# Altium PCB ADC_Board.PcbDoc
Units mm, origin at the board's own origin, x right, y up, seen from the top; angles counter-clockwise.
Board outline 60 x 60 mm, 2 copper layers (Top Layer, Bottom Layer); 77 components, 55 nets, 212 pads, 89 vias.
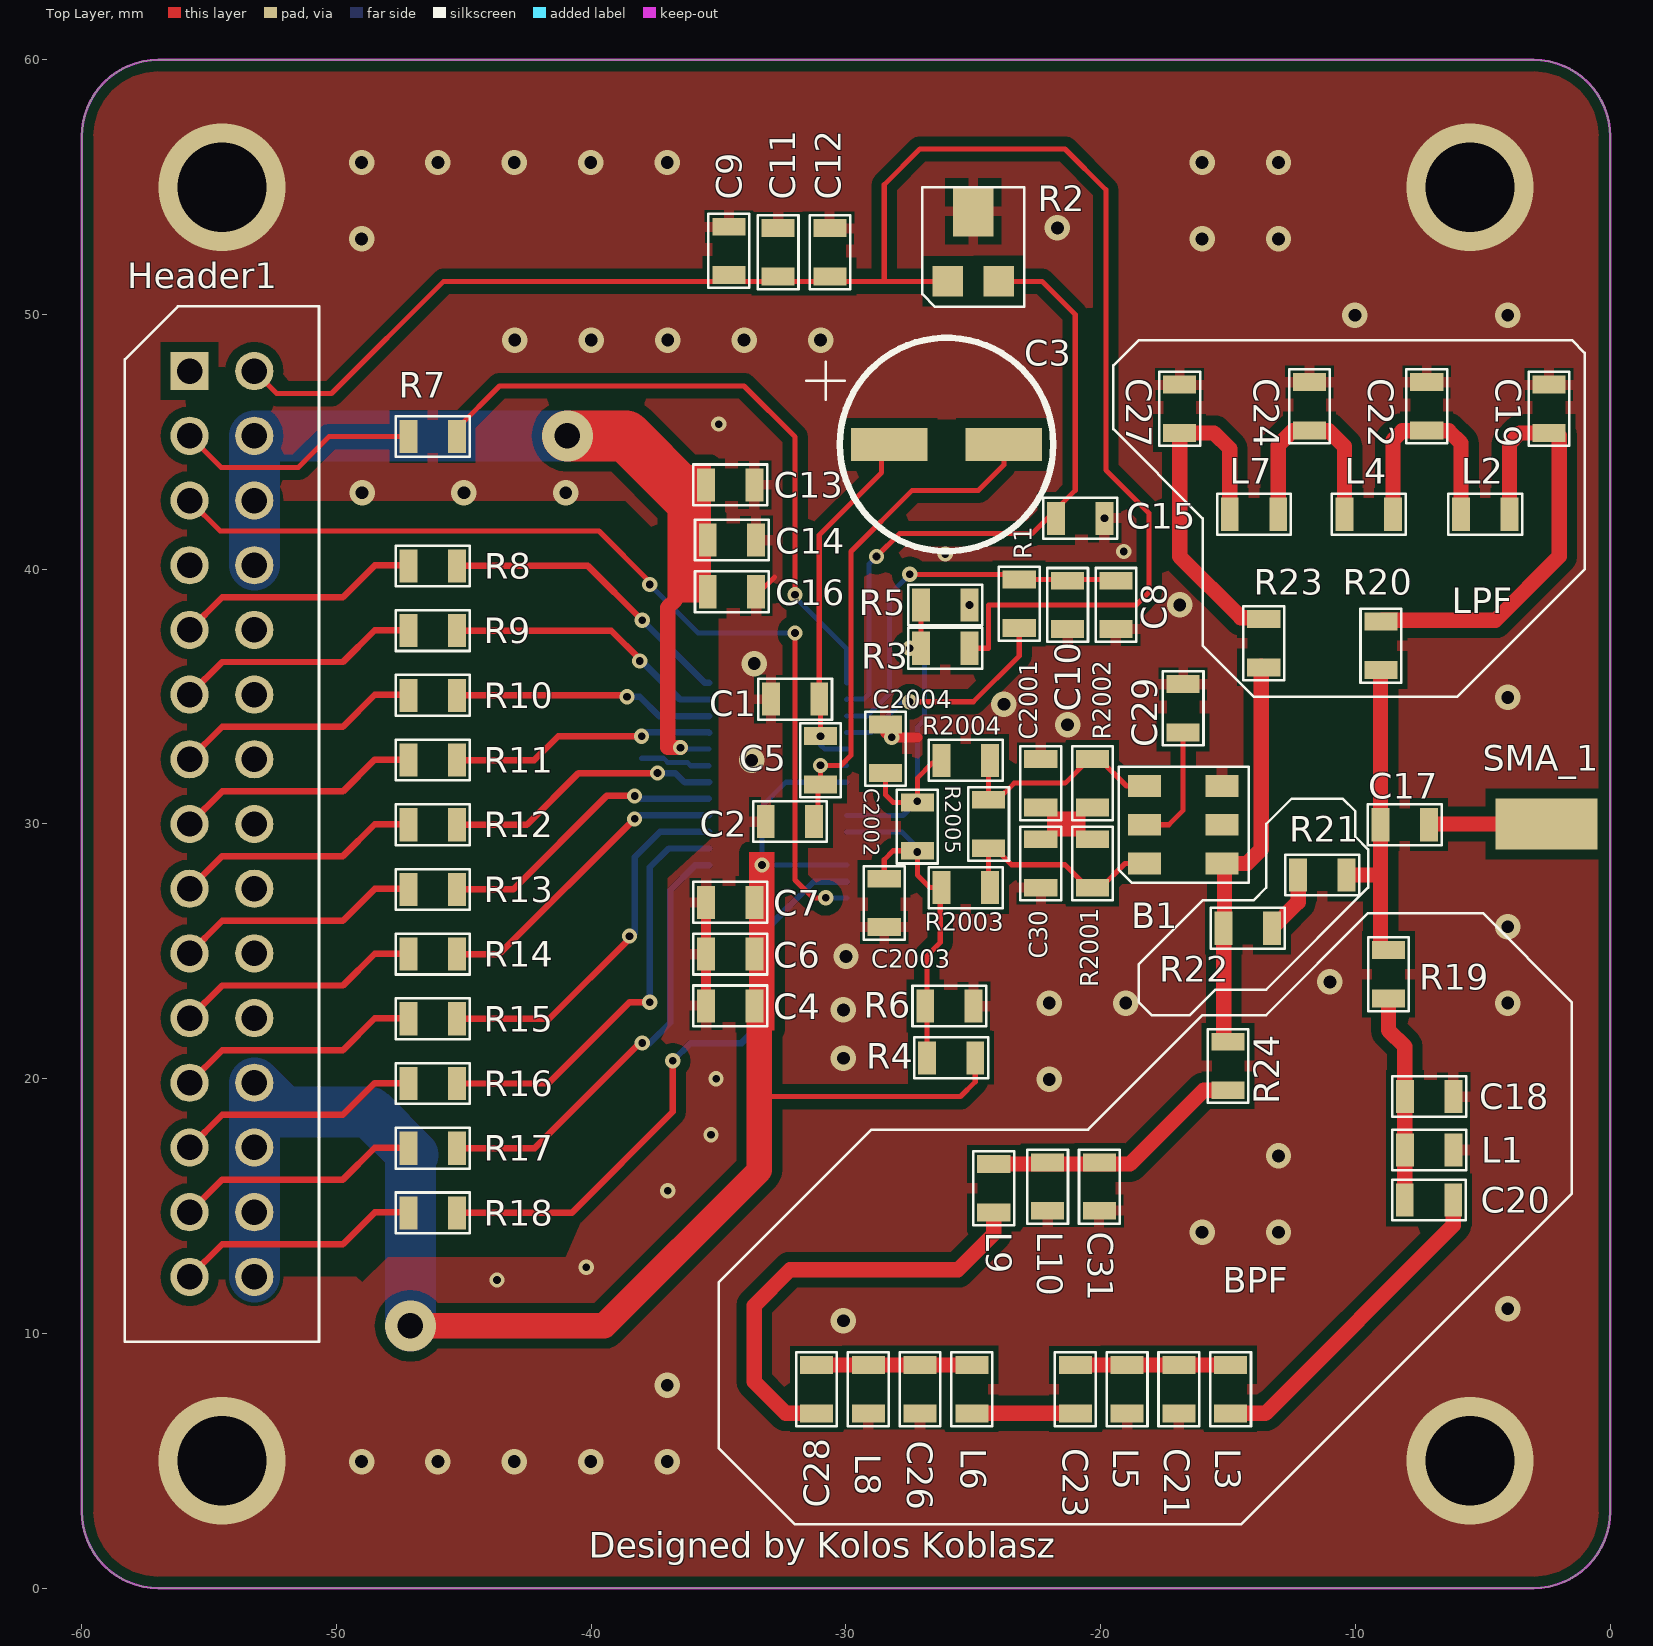
[diagram p0: Top Layer view]
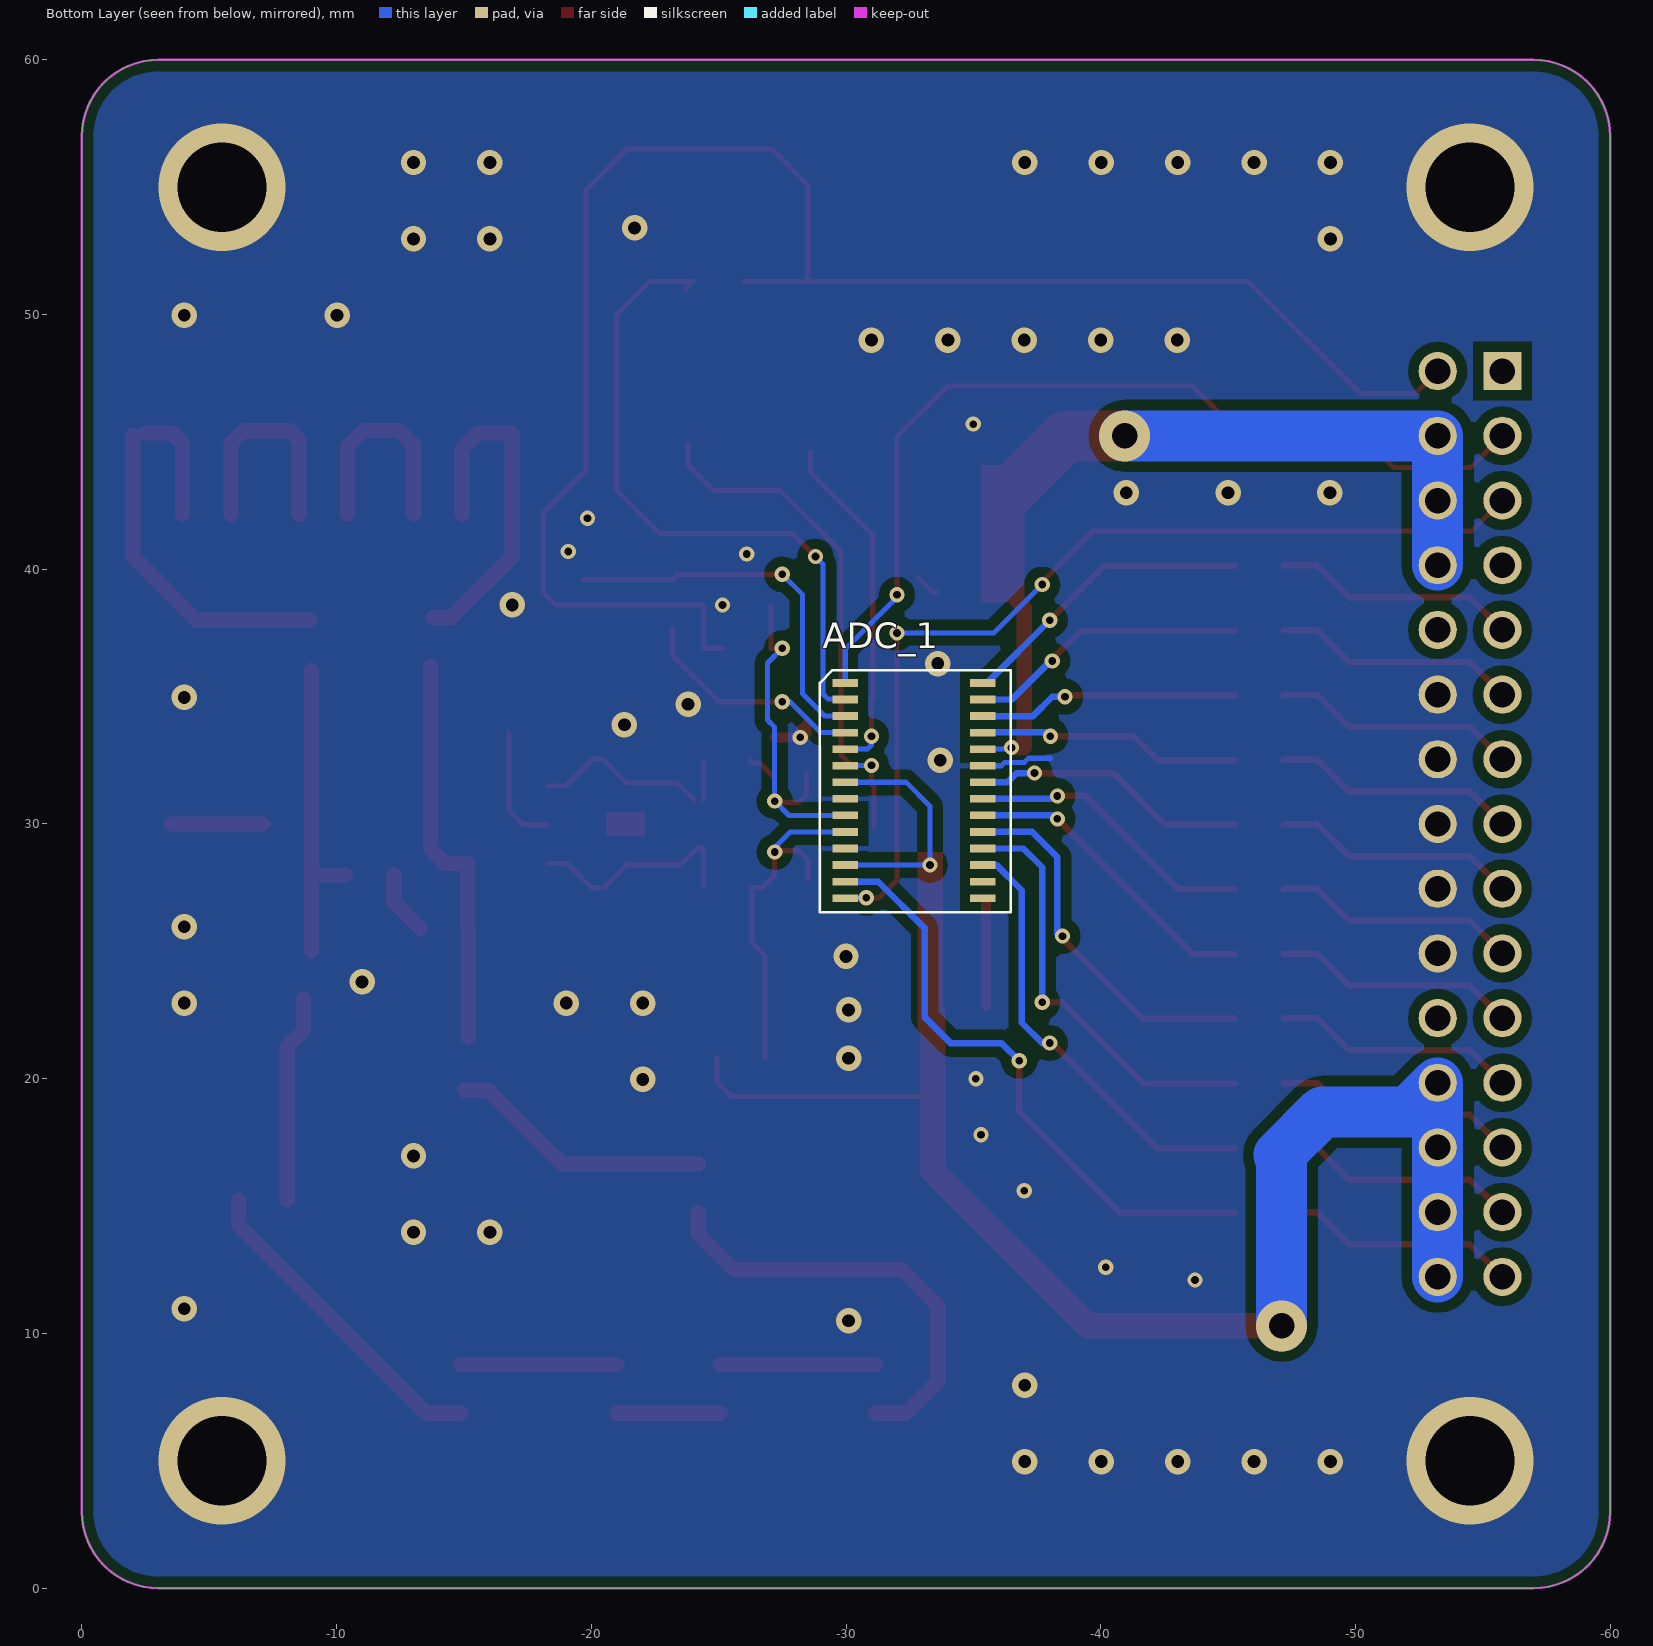
[diagram p1: Bottom Layer view, seen from below]

## Layer stack, top to bottom
Top Solder: solder mask 0.0102, Solder Resist, Dk 3.5
Top Layer: signal copper 0.0356
Dielectric 1: dielectric 0.32, FR-4, Dk 4.8
Bottom Layer: signal copper 0.0356
Bottom Solder: solder mask 0.0102, Solder Resist, Dk 3.5

## Board outline
-57,0 cw(c-57,3) -60,3 -60,57 cw(c-57,57) -57,60 -3,60 cw(c-3,57) 0,57 0,3 cw(c-3,3) -3,0

## Design rules (kind name [scope] priority, off if disabled: settings)
Clearance "Stitching GND" [IsStitchingVia and InNet('GND') vs (IsVia and (Not IsStitchingVia)) Or IsPad  Or IsTrack] p1: gap=2
Clearance Clearance_1 [All vs OnLayer('Keep-Out Layer')] p2: gap=0.4 except(0.2: SMDPad-Poly THPad-Poly Via-Poly)
Clearance [All] p3: gap=0.18 except(0.4: Track-Poly SMDPad-Poly THPad-Poly Via-Poly Fill-Poly)
HoleSize [All] p1: absolutevalues=TRUE maxlimit=6.7 minlimit=0.3 maxpercent=80.000 minpercent=20.000
Length [All] p1: maxlimit=2540 minlimit=0
MatchedLengths MatchedLengths_ADC [InNetClass('ADC_DataBus')] p1: tolerance=1 checknetsindiffpair=TRUE checkdiffpairvsdiffpair=FALSE checkxsignals=FALSE checkothers=FALSE
MatchedLengths MatchedLengths_DAC [InNetClass('DAC_DataBus')] p2: tolerance=1 checknetsindiffpair=TRUE checkdiffpairvsdiffpair=FALSE checkxsignals=FALSE checkothers=FALSE
MinimumAnnularRing [All] p1: minimumring=0.076
MinimumSolderMaskSliver [All] p1: minsoldermaskwidth=0
ParallelSegment [All] p1: limit=254 gap=0.254
PolygonConnect PolygonConnect_1 [HasFootprint('0805 SMD Passive')] p1: connectstyle=Relief reliefconductorwidth=0.4 reliefentries=4 polygonreliefangle="90 Angle" airgapwidth=0.3
PolygonConnect PolygonConnect_3 [HasFootprint('Balun_Coil_Craft_WBC')] p2: connectstyle=Relief reliefconductorwidth=0.4 reliefentries=4 polygonreliefangle="90 Angle" airgapwidth=0.3
PolygonConnect [HasFootprint('TC33-2')] p3: connectstyle=Relief reliefconductorwidth=0.4 reliefentries=4 polygonreliefangle="90 Angle" airgapwidth=0.3
PolygonConnect PolygonConnect_2 [All] p4: connectstyle=Direct reliefconductorwidth=0.4 reliefentries=4 polygonreliefangle="90 Angle" airgapwidth=0.3
RoutingTopology [All] p1: topology=Starburst
RoutingVias [All] p1: holewidth=0.5 width=1 viastyle="Through Hole" minholewidth=0.3 minwidth=0.45 maxholewidth=1 maxwidth=6
SilkToSilkClearance [All] p1: silktosilkclearance=0
SilkToSolderMaskClearance [IsPad] p1: minsilkscreentomaskgap=0 clearancetoexposedcopper=TRUE
SolderMaskExpansion [All] p1: expansion=0.102
Width [All] p1: maxlimit=5 minlimit=0.127 preferedwidth=0.254
25 further rules are at their usual default settings.

## Classes and differential pairs
net class ADC_DataBus: ADC_CLK ADC_D0 ADC_D1 ADC_D2 ADC_D3 ADC_D4 ADC_D5 ADC_D6 ADC_D7 ADC_D8 ADC_D9
component class ADC_Filter: C17 C18 C19 C20 C21 C22 C23 C24 C26 C27 C28 C31 L1 L2 L3 L4 L5 L6 L7 L8 L9 L10 R19 R20 R21 R22 R23 R24 SMA_1
component class ADC_board: ADC_1 B1 C1 C2 C3 C4 C5 C6 C7 C8 C9 C10 C11 C12 C13 C14 C15 C16 C29 C30 C2001 C2002 C2003 C2004 Header1 R1 R2 R3 R4 R5 R6 R7 R8 R9 R10 R11 R12 R13 R14 R15 R16 R17 R18 R2001 R2002 R2003 R2004 R2005

## Components (designator, comment, footprint, x,y, rotation, side; value= is the part's Value field where it differs from the comment)
ADC_1 "AD9215" AD9215 -29.972,35.538 r270 bottom locked
B1 "Balun" Balun_Coil_Craft_WBC -18.288,28.452 r90 top
C1 "Cap1" "0805 SMD Passive" -32,34.9 r0 top
C2 "Cap1" "0805 SMD Passive" -32.2,30.1 r180 top
C3 "Cap2" ELKO_CAP -28.3,44.9 r270 top
C4 "Cap1" "0805 SMD Passive" -34.544,22.86 r180 top
C5 "Cap1" "0805 SMD Passive" -31,32.5 r270 top
C6 "Cap1" "0805 SMD Passive" -34.544,24.892 r180 top
C7 "Cap1" "0805 SMD Passive" -34.544,26.924 r180 top
C8 "Cap1" "0805 SMD Passive" -19.4,38.6 r270 top
C9 "Cap1" "0805 SMD Passive" -34.6,52.5 r90 top
C10 "Cap1" "0805 SMD Passive" -21.3,38.6 r270 top
C11 "Cap1" "0805 SMD Passive" -32.664,52.444 r90 top
C12 "Cap1" "0805 SMD Passive" -30.632,52.444 r90 top
C13 "Cap1" "0805 SMD Passive" -34.544,43.314 r0 top
C14 "Cap1" "0805 SMD Passive" -34.478,41.148 r0 top
C15 "Cap1" "0805 SMD Passive" -20.8,42 r0 top
C16 "Cap1" "0805 SMD Passive" -34.478,39.116 r0 top
C17 "Cap1" "0805 SMD Passive" -8.062,29.972 r0 top
C18 "Cap1" "0805 SMD Passive" -7.1,19.3 r0 top
C19 "Cap1" "0805 SMD Passive" -2.4,46.3 r270 top
C20 "Cap1" "0805 SMD Passive" -7.112,15.24 r0 top
C21 "Cap1" "0805 SMD Passive" -16.932,7.812 r270 top
C22 "Cap1" "0805 SMD Passive" -7.2,46.4 r270 top
C23 "Cap1" "0805 SMD Passive" -20.996,7.812 r270 top
C24 "Cap1" "0805 SMD Passive" -11.8,46.4 r270 top
C26 "Cap1" "0805 SMD Passive" -27.092,7.812 r270 top
C27 "Cap1" "0805 SMD Passive" -16.9,46.3 r270 top
C28 "Cap1" "0805 SMD Passive" -31.156,7.812 r270 top
C29 "Cap1" "0805 SMD Passive" -16.764,34.544 r270 top
C30 "Cap1" "0805 SMD Passive" -22.352,28.448 r90 top
C31 "Cap1" "0805 SMD Passive" -20.052,15.764 r270 top
C2001 "Cap1" "0805 SMD Passive" -22.352,31.604 r270 top
C2002 "Cap1" "0805 SMD Passive" -27.2,29.9 r90 top
C2003 "Cap1" "0805 SMD Passive" -28.5,26.9 r270 top
C2004 "Cap1" "0805 SMD Passive" -28.448,32.954 r270 top
Header1 "Header1" Header1 -54.5,30 r270 top
L1 "Inductor" "0805 SMD Passive" -7.1,17.2 r180 top
L2 "Inductor" "0805 SMD Passive" -4.904,42.16 r0 top
L3 "Inductor" "0805 SMD Passive" -14.9,7.812 r90 top
L4 "Inductor" "0805 SMD Passive" -9.476,42.16 r0 top
L5 "Inductor" "0805 SMD Passive" -18.964,7.812 r90 top
L6 "Inductor" "0805 SMD Passive" -25.06,7.812 r90 top
L7 "Inductor" "0805 SMD Passive" -13.982,42.16 r0 top
L8 "Inductor" "0805 SMD Passive" -29.124,7.812 r90 top
L9 "Inductor" "0805 SMD Passive" -24.2,15.7 r90 top
L10 "Inductor" "0805 SMD Passive" -22.084,15.764 r90 top
R1 "Resistor" "0805 SMD Passive" -23.2,38.65 r90 top
R2 "VariableResistor" TC33-2 -26.004,51.306 r0 top
R3 "Resistor" "0805 SMD Passive" -26.1,36.9 r180 top
R4 "Resistor" "0805 SMD Passive" -25.874,20.82 r180 top
R5 "Resistor" "0805 SMD Passive" -26.1,38.6 r0 top
R6 "Resistor" "0805 SMD Passive" -25.94,22.852 r0 top
R7 "Resistor" "0805 SMD Passive" -46.228,45.212 r180 top
R8 "Resistor" "0805 SMD Passive" -46.228,40.132 r180 top
R9 "Resistor" "0805 SMD Passive" -46.228,37.592 r180 top
R10 "Resistor" "0805 SMD Passive" -46.228,35.052 r180 top
R11 "Resistor" "0805 SMD Passive" -46.228,32.512 r180 top
R12 "Resistor" "0805 SMD Passive" -46.228,29.972 r180 top
R13 "Resistor" "0805 SMD Passive" -46.228,27.432 r180 top
R14 "Resistor" "0805 SMD Passive" -46.228,24.892 r180 top
R15 "Resistor" "0805 SMD Passive" -46.228,22.352 r180 top
R16 "Resistor" "0805 SMD Passive" -46.228,19.812 r180 top
R17 "Resistor" "0805 SMD Passive" -46.228,17.272 r180 top
R18 "Resistor" "0805 SMD Passive" -46.228,14.732 r180 top
R19 "Resistor" "0805 SMD Passive" -8.7,24.1 r90 top
R20 "Resistor" "0805 SMD Passive" -9,37 r270 top
R21 "Resistor" "0805 SMD Passive" -11.3,28 r0 top
R22 "Resistor" "0805 SMD Passive" -14.224,25.908 r0 top
R23 "Resistor" "0805 SMD Passive" -13.6,37.1 r90 top
R24 "Resistor" "0805 SMD Passive" -15,20.5 r270 top
R2001 "Resistor" "0805 SMD Passive" -20.32,28.448 r270 top
R2002 "Resistor" "0805 SMD Passive" -20.32,31.604 r270 top
R2003 "Resistor" "0805 SMD Passive" -25.3,27.5 r180 top
R2004 "Resistor" "0805 SMD Passive" -25.3,32.5 r180 top
R2005 "Resistor" "0805 SMD Passive" -24.4,30 r270 top
SMA_1 "SMA1" "SMA Flange" -2.5,30 r90 top

## Footprints (in the part's own frame and the unit in brackets; to place one, negate y for a bottom-side part, rotate by r counter-clockwise, add the part's x,y. Pads: shape width x height; smd on the part's side, far side on the other; paste and mask are expansions set on the pad)
"0805 SMD Passive" [mm] "General 0805 SMD componenet footprint"
  rect 0.7x1.3 smd: 1(-0.95,0) 2(0.95,0)
  Top Layer pour cut-out: -0.6,0.65 0.6,0.65 0.6,-0.65 -0.6,-0.65
  silkscreen extent -1.45,-0.8 1.45,0.8, body extent -1.15,-0.6 1.15,0.6, height 0.45
AD9215 [mm] "TSSOP-28"
  rect 0.3x1 smd: 1(0,0) 2(0.65,0) 3(1.3,0) 4(1.95,0) 5(2.6,0) 6(3.25,0) 7(3.9,0) 8(4.55,0) 9(5.2,0) 10(5.85,0) 11(6.5,0) 12(7.15,0) 13(7.8,0) 14(8.45,0) 15(8.45,5.4) 16(7.8,5.4) 17(7.15,5.4) 18(6.5,5.4) 19(5.85,5.4) 20(5.2,5.4) 21(4.55,5.4) 22(3.9,5.4) 23(3.25,5.4) 24(2.6,5.4) 25(1.95,5.4) 26(1.3,5.4) 27(0.65,5.4) 28(0,5.4)
  silkscreen extent -0.5,-1 9,6.5, body extent 0,0 8.5,5.5, height 1.45
Balun_Coil_Craft_WBC [mm] "SMD Transformer"
  rect 0.85x1.3 smd: 1(0,0) 2(1.52,0) 3(3.04,0) 4(3.04,-3.05) 5(1.52,-3.05) 6(0,-3.05)
  Top Layer pour cut-out: -0.8,-0.8 3.8,-0.8 3.8,-2.2 -0.8,-2.2
  silkscreen extent -0.75,-4.1 3.8,1, body extent -0.25,-3.75 3.04,0.25, height 3
ELKO_CAP [mm] "Electrolit SMD capacitor"
  rect 1.3x3 smd: 1(0,0) 2(0,4.5)
  Top Layer pour cut-out: 1,3 -1,3 -1,1.5 1,1.5
  silkscreen extent -4.19,-3.25 4.19,6.44, body extent -2.48,0.01 2.5,5, height 5.4
Header1 [mm] "30-Pin DIL"
  rect 1.5x1.5 hole 1: 1(-17.78,-1.27)
  round 1.5 hole 1: 2(-17.78,1.27) 3(-15.24,-1.27) 4(-15.24,1.27) 5(-12.7,-1.27) 6(-12.7,1.27) 7(-10.16,-1.27) 8(-10.16,1.27) 9(-7.62,-1.27) 10(-7.62,1.27) 11(-5.08,-1.27) 12(-5.08,1.27) 13(-2.54,-1.27) 14(-2.54,1.27) 15(0,-1.27) 16(0,1.27) 17(2.54,-1.27) 18(2.54,1.27) 19(5.08,-1.27) 20(5.08,1.27) 21(7.62,-1.27) 22(7.62,1.27) 23(10.16,-1.27) 24(10.16,1.27) 25(12.7,-1.27) 26(12.7,1.27) 27(15.24,-1.27) 28(15.24,1.27) 29(17.78,-1.27) 30(17.78,1.27)
  silkscreen extent -20.32,-3.81 20.32,3.81, body extent -19.28,-3.27 19.72,3.23, height 2
"SMA Flange" [mm] "Flange Connector"
  rect 2x4 smd: 1(0,0)
TC33-2 [mm] "Variable resistor"
  rect 1.2x1.2 smd: 1(0,0) 3(2,0)
  rect 1.6x2 smd: 2(1,2.75)
  silkscreen extent -1,-1 3,3.7, body extent -0.79,-0.3 2.8,3.3, height 1.2

## Part data
ADC_1: "Analog Digital Converter"
B1: library part Balun3, "SMD Balun"
C1 C2 C4 C5 C6 C7 C8 C9 C10 C11 C12 C13 C14 C15 C16 C17 C18 C19 C20 C21 C22 C23 C24 C26 C27 C28 C29 C30 C31 C2001 C2002 C2003 C2004: "SMD Capacitor"
C3: "SMD Polarized Capacitor"
Header1: "29 Pin Header"
L1 L2 L3 L4 L5 L6 L7 L8 L9 L10: library part Ind1, "SMD Inductor"
R1 R3 R4 R5 R6 R7 R8 R9 R10 R11 R12 R13 R14 R15 R16 R17 R18 R19 R20 R21 R22 R23 R24 R2001 R2002 R2003 R2004 R2005: library part Res1, "SMD Resistor"
R2: library part VarRes1, "SMD Variable Resistor"
SMA_1: "SMA Female"

## Via types
v1: diameter 1, hole 0.5, Top Layer to Bottom Layer, tented top, 26 vias
v2: diameter 0.6, hole 0.3, Top Layer to Bottom Layer, tented bottom, 25 vias
v3: diameter 1, hole 0.5, Top Layer to Bottom Layer, tented both sides, 21 vias
v4: diameter 0.6, hole 0.3, Top Layer to Bottom Layer, tented both sides, 11 vias
v5: diameter 5, hole 3.5, Top Layer to Bottom Layer, tented both sides, 4 vias
v6: diameter 2, hole 1, Top Layer to Bottom Layer, 2 vias

## Nets (pads, with @x,y where several pads share a name; then routed paths per layer and width w, separated by ;. In a path a pad name is that pad's centre, name@x,y a point inside that pad or via, vN(x,y) a via of type N, cw(c..) or ccw(c..) an arc to the next point about the centre after c; other vN are vias at no path point)
ADC_AVDD_2: C9.1 C11.1 C12.1 Header1.2 R2.1 R3.1 | length 68.6
  Top Layer w0.2: Header1.2 -52.35,46.9 -50.2,46.9 -45.794,51.306 -28.5,51.306 ; R2.1 -28.5,51.306 ; R3.1 -24.4,36.9 -24.4,38.6 -18.6,38.6 -18.1,39.1 -18.1,42.2 -19.8,43.9 -19.8,54.9 -21.4,56.5 -27.1,56.5 -28.5,55.1 -28.5,51.306
ADC_AVDD_FILT: ADC_1.7 ADC_1.12 C4.1 C6.1 C7.1 Header1.24 Header1.26 Header1.28 Header1.30 R4.1 | length 63.1
  Top Layer w0.2: -33.4,19.3 -25.5,19.3 -24.924,19.876 R4.1
  Top Layer w1: v6(-47.1,10.3) -39.5,10.3 -33.4,16.4 -33.4,19.3 C4.1@-33.4,22.6
  Bottom Layer w0.2: v2(-33.3,28.388) -33.3,30.7 -32.362,31.638 ADC_1.7 ; v2@-33.188,28.388 ADC_1.12
  Bottom Layer w2: Header1.30 Header1.28 Header1.26 Header1.24 -52.09,18.7 -48.7,18.7 -47,17 -47.1,16.9 v6(-47.1,10.3)
ADC_CLK: ADC_1.13 R18.1 | length 23.9
  Top Layer w0.254: R18.1 -40.768,14.732 -36.8,18.7 v2(-36.8,20.7)
  Bottom Layer w0.254: v2(-36.8,20.7) -36.1,21.4 -34.1,21.4 -33.1,22.4 -33.1,25.9 -31.262,27.738 ADC_1.13
ADC_D0: ADC_1.17 R17.1 | length 17.6
  Top Layer w0.254: R17.1 -42.228,17.272 -38.1,21.4 v2(-38,21.4)
  Bottom Layer w0.254: v2(-38,21.4) -37.7,21.4 -36.9,22.2 -36.9,27.4 -35.912,28.388 ADC_1.17
ADC_D1: ADC_1.18 R16.1 | length 16.8
  Top Layer w0.254: R16.1 -41.688,19.812 -38.5,23 v2(-37.7,23)
  Bottom Layer w0.254: v2(-37.7,23) -37.7,28.3 -36.962,29.038 ADC_1.18
ADC_D2: ADC_1.19 R15.1 | length 14.5
  Top Layer w0.254: R15.1 -41.648,22.352 v2@-38.5,25.5
  Bottom Layer w0.254: v2(-38.5,25.6) v2@-38.4,25.6 ; v2@-38.3,25.7 -38.3,28.7 -37.312,29.688 ADC_1.19
ADC_D3: ADC_1.20 R14.1 | length 12.2
  Top Layer w0.254: R14.1 -43.608,24.892 v2(-38.3,30.2)
  Bottom Layer w0.254: v2(-38.3,30.2) -38.162,30.338 ADC_1.20
ADC_D4: ADC_1.21 R13.1 | length 11.5
  Top Layer w0.254: R13.1 -43.068,27.432 -39.4,31.1 v2(-38.3,31.1)
  Bottom Layer w0.254: v2(-38.3,31.1) -38.2,31 ADC_1.21@-35.384,31
ADC_D5: ADC_1.22 R12.1 | length 11
  Top Layer w0.254: R12.1 -42.528,29.972 -40.5,32 v2(-37.4,32)
  Bottom Layer w0.254: v2@-37.526,32 v2(-37.4,32) -36.7,32 -36.338,31.638 ADC_1.22
ADC_D6: ADC_1.25 R11.1 | length 10.4
  Top Layer w0.254: R11.1 -42.238,32.512 -41.3,33.45 v2(-38.025,33.45)
  Bottom Layer w0.254: v2(-38.025,33.45) -37.868,33.607 -35.391,33.607 ADC_1.25
ADC_D7: ADC_1.26 R10.1 | length 10.2
  Top Layer w0.254: R10.1 -38.652,35.052 v2(-38.6,35)
  Bottom Layer w0.254: v2(-38.6,35) -38.1,35 -37.338,34.238 ADC_1.26
ADC_D8: ADC_1.27 R9.1 | length 11.1
  Top Layer w0.254: R9.1 -39.217,37.592 -38.1,36.475 v2(-38.1,36.4)
  Bottom Layer w0.254: v2(-38.1,36.4) -38.025,36.4 -36.513,34.888 ADC_1.27
ADC_D9: ADC_1.28 R8.1 | length 11.8
  Top Layer w0.254: R8.1 -40.132,40.132 v2(-38,38)
  Bottom Layer w0.254: v2(-38,38) -35.538,35.538 ADC_1.28
ADC_DVDD_FILT: ADC_1.24 C13.1 C14.1 C16.1 Header1.4 Header1.6 Header1.8 | length 30.4
  Top Layer w0.6: -36.7,38.8 -37,38.5 -37,33 v2(-36.5,33)
  Top Layer w2: v6(-40.94,45.24) -38.64,45.24 -36.4,43
  Bottom Layer w0.2: v2@-36.5,32.938 ADC_1.24
  Bottom Layer w2: Header1.8 Header1.6 Header1.4 v6(-40.94,45.24)
ADC_MODE: ADC_1.2 C15.1 R2.3 | length 26.2
  Top Layer w0.2: v2(-28.8,40.5) -27.9,41.4 -22.7,41.4 -21,43.1 -21,50 -22.306,51.306 R2.3 R2.3@-23.698,51
  Bottom Layer w0.2: ADC_1.2 -29.96,34.9 -29.3,34.9 -29.1,35.1 -29.1,40.2 v2(-28.8,40.5)
ADC_OR: ADC_1.1 R7.1 | length 25.6
  Top Layer w0.2: R7.1 -45.278,45.522 -43.6,47.2 -34,47.2 -32,45.2 v2(-32,39)
  Bottom Layer w0.2: v2(-32,39) -32,38.9 -29.972,36.872 ADC_1.1
ADC_POWERDOWN: ADC_1.14 Header1.5 | length 38.1
  Top Layer w0.2: Header1.5 -54.57,41.5 -39.7,41.5 -37.7,39.5 v2(-37.7,39.4) ; v2(-32,37.5) -32,27.8 -31.3,27.1 v2(-30.8,27.1)
  Bottom Layer w0.2: v2(-37.7,39.4) -35.8,37.5 v2(-32,37.5) ; v2(-30.8,27.1) v2@-30.7,27.1 ; v2@-30.788,27.088 ADC_1.14
ADC_REFB: ADC_1.5 C1.2 C3.1 C5.1 | length 13.6
  Top Layer w0.2: C1.2 -31.05,41.35 -28.6,43.8 C3.1@-28.6,44.6 ; v2(-31,33.45) C1.2@-31,34.85
  Bottom Layer w0.2: v2(-31,33.45) -31,33.1 -30.838,32.938 ADC_1.5
ADC_REFT: ADC_1.6 C2.1 C3.2 C5.2 | length 20.9
  Top Layer w0.2: C2.1@-31.1,29.9 C5.2@-31.1,31.45 ; C5.2 v2(-31,32.3) -30.2,32.3 -29.8,32.7 -29.8,40.7 -27.4,43.1 -24.8,43.1 -23.8,44.1 C3.2
  Bottom Layer w0.2: v2(-31,32.3) ADC_1.6@-29.984,32.3
ADC_SENSE: ADC_1.3 C8.1 C10.1 R1.2 | length 14.9
  Top Layer w0.2: v2(-27.5,39.8) -23.4,39.8 R1.2 C8.1@-19.7,39.6
  Bottom Layer w0.2: ADC_1.3 -29.162,34.238 -28.3,35.1 -28.3,39 v2(-27.5,39.8)
ADC_VIN+: ADC_1.9 C2002.2 C2004.2 R3.2 R5.1 R2004.2 | length 15.9
  Top Layer w0.2: C2004.2 -28.448,31.148 -28.15,30.85 C2002.2 ; v2(-27.5,36.9) R3.2 R5.1 ; v2(-27.2,30.9) -27.2,31.8 -26.6,32.4 -26.35,32.4 R2004.2
  Bottom Layer w0.2: ADC_1.9 -27.762,30.338 v2(-27.2,30.9) -27.2,33.8 -26.92,34.08 -26.92,36.32 v2(-27.5,36.9)
ADC_VIN-: ADC_1.10 C2002.1 C2003.1 R4.2 R6.1 R2003.2 | length 14.4
  Top Layer w0.2: C2003.1 -28.5,28.6 -28.15,28.95 C2002.1 v2(-27.2,28.9) -27.2,28 -26.7,27.5 R2003.2 -26.3,27.45 -26.3,25.348 -26.824,24.824 R4.2
  Bottom Layer w0.2: ADC_1.10 -27.812,29.688 -27.2,29.076 v2(-27.2,28.9)
ADC_VREF: ADC_1.4 R1.1 | length 9.1
  Top Layer w0.2: v2(-27.5,34.8) -25,34.8 -23.2,36.6 R1.1
  Bottom Layer w0.2: ADC_1.4 -29.012,33.588 -27.8,34.8 v2(-27.5,34.8)
BALUN_V+: B1.3 R2002.1 R2004.1 R2005.1 | length 8.4
  Top Layer w0.2: R2005.1 R2004.1@-24.4,32.45 ; R2005.1@-24.05,30.95 -23.396,31.604 -21.396,31.604 -20.446,32.554 R2002.1 -20.054,32.554 -18.992,31.492 B1.3
BALUN_V-: B1.1 R2001.2 R2003.1 R2005.2 | length 8.5
  Top Layer w0.2: R2003.1@-24.4,27.55 R2005.2 -24.15,29.05 -23.5,28.4 -21.4,28.4 R2001.2@-20.498,27.498 ; R2001.2 -20.002,27.498 -19.048,28.452 B1.1
FILTER_INPUT: C17.1 R19.2 R20.2 R21.2 | length 12.4
  Top Layer w0.6: R21.2 -9.012,28 ; R19.2@-9.012,25 -9.012,28 ; R20.2@-9.012,36.05 C17.1 -9.012,28
FILTER_OUTPUT: B1.6 R22.1 R23.1 R24.1 | length 15.6
  Top Layer w0.6: R24.1@-15.174,21.624 R22.1 ; R22.1@-15.138,25.972 -15.138,28.452 -14.248,28.452 -13.7,29 R23.1@-13.7,36.2
GND: ADC_1.8 ADC_1.11 ADC_1.23 B1.4 C1.1 C2.2 C4.2 C6.2 C7.2 C8.2 C9.2 C10.2 C11.2 C12.2 C13.2 C14.2 C15.2 C16.2 C18.2 C19.1 C21.2 C22.1 C24.1 C26.2 C27.1 C29.1 C30.1 C31.2 C2001.1 C2003.2 C2004.1 Header1.12 Header1.14 Header1.16 Header1.18 Header1.20 L1.1 L5.1 L8.1 L10.1 R2.2 R5.2 R6.2 | length 10.1
  Top Layer w0.2: C16.2 -33.384,39.116 -32.8,39.7
  Top Layer w0.4: C4.2 C6.2 C7.2 ; -27.204,33.4 v4(-28.2,33.4) ; v4(-28.2,33.4) -28.448,33.548 C2004.1 -28.2,33.656 v4(-28.2,33.4)
  Bottom Layer w0.2: -38.02,32.58 -37.16,32.58 -37,32.42 -36.232,32.42 -36.1,32.288 ADC_1.23
  other v1: -43.02,4.97 -40.02,4.97 -37.02,4.97 -37.02,7.97 -4.02,10.97 -16.02,13.97 -13.02,13.97 -13.02,16.97 -22.02,19.97 -22.02,22.97 -19.02,22.97 -4.02,22.97 -4.02,25.97 -4.02,34.97 -10.02,49.97 -4.02,49.97 -49.02,52.97 -16.02,52.97 -13.02,52.97 -49.02,55.97 -46.02,55.97 -43.02,55.97 -40.02,55.97 -37.02,55.97 -16.02,55.97 -13.02,55.97
  other v3: -49.02,4.97 -46.02,4.97 -30.1,10.5 -30.1,20.8 -30.1,22.7 -11,23.8 -30,24.8 -33.7,32.5 -21.3,33.9 -23.8,34.7 -33.6,36.3 -16.9,38.6 -49,43 -45,43 -41,43 -43,49 -40,49 -37,49 -34,49 -31,49 -21.7,53.4
  other v4: -43.7,12.1 -40.2,12.6 -37,15.6 -35.3,17.8 -35.1,20 -25.15,38.6 -26.1,40.6 -19.1,40.7 -19.85,42 -35,45.7
  other v5: -54.5,5 -5.5,5 -54.5,55 -5.5,55
H_ADC_CLK: Header1.29 R18.2 | length 9.6
  Top Layer w0.254: Header1.29 -54.49,13.5 -49.75,13.5 -48.5,14.75 -47.196,14.75 R18.2
H_ADC_D0: Header1.27 R17.2 | length 9.6
  Top Layer w0.254: Header1.27 -54.49,16.04 -49.75,16.04 -48.5,17.29 -47.196,17.29 R17.2
H_ADC_D1: Header1.25 R16.2 | length 9.6
  Top Layer w0.254: Header1.25 -54.49,18.58 -49.75,18.58 -48.5,19.83 -47.196,19.83 R16.2
H_ADC_D2: Header1.23 R15.2 | length 9.6
  Top Layer w0.254: Header1.23 -54.49,21.12 -49.75,21.12 -48.5,22.37 -47.196,22.37 R15.2
H_ADC_D3: Header1.21 R14.2 | length 9.6
  Top Layer w0.254: Header1.21 -54.49,23.66 -49.75,23.66 -48.5,24.91 -47.196,24.91 R14.2
H_ADC_D4: Header1.19 R13.2 | length 9.6
  Top Layer w0.254: Header1.19 -54.49,26.2 -49.75,26.2 -48.5,27.45 -47.196,27.45 R13.2
H_ADC_D5: Header1.17 R12.2 | length 9.6
  Top Layer w0.254: Header1.17 -54.49,28.74 -49.75,28.74 -48.5,29.99 -47.196,29.99 R12.2
H_ADC_D6: Header1.15 R11.2 | length 9.6
  Top Layer w0.254: Header1.15 -54.49,31.28 -49.75,31.28 -48.5,32.53 -47.196,32.53 R11.2
H_ADC_D7: Header1.13 R10.2 | length 9.6
  Top Layer w0.254: Header1.13 -54.49,33.82 -49.75,33.82 -48.5,35.07 -47.196,35.07 R10.2
H_ADC_D8: Header1.11 R9.2 | length 9.6
  Top Layer w0.254: Header1.11 -54.49,36.36 -49.75,36.36 -48.5,37.61 -47.196,37.61 R9.2
H_ADC_D9: Header1.9 R8.2 | length 9.6
  Top Layer w0.254: Header1.9 -54.49,38.9 -49.75,38.9 -48.5,40.15 -47.196,40.15 R8.2
H_ADC_OR: Header1.3 R7.2 | length 9.6
  Top Layer w0.2: Header1.3 -54.53,44 -51.5,44 -50.288,45.212 R7.2
NetB1_2: B1.2 C29.2 | length 4.8
  Top Layer w0.2: B1.2 -17.328,29.972 -16.764,30.536 C29.2
NetC17_2: C17.2 SMA_1.1 | length 3.6
  Top Layer w0.6: C17.2@-7.084,30 SMA_1.1@-3.5,30
NetC18_1: C18.1 C20.1 L1.2 R19.1 | length 8.2
  Top Layer w0.6: R19.1 -8.7,21.9 -8.062,21.262 -8.062,17.272 C20.1
NetC19_2: C19.2 L2.2 R20.1 | length 17.1
  Top Layer w0.6: R20.1@-8.95,38 -4.5,38 -2,40.5 C19.2@-2,45.25 ; L2.2 -3.954,44.946 -3.55,45.35 C19.2@-2.5,45.35
NetC20_2: C20.2 L3.1 | length 12.8
  Top Layer w0.6: L3.1 -13.538,6.862 -6.162,14.238 C20.2
NetC21_1: C21.1 C23.1 L3.2 L5.2 | length 6.1
  Top Layer w0.6: C23.1 L5.2 L3.2
NetC22_2: C22.2 L2.1 L4.2 | length 8.7
  Top Layer w0.6: L4.2 -8.526,45.074 -8.16,45.44 -6.34,45.44 -5.854,44.954 L2.1
NetC23_2: C23.2 L6.1 | length 4.1
  Top Layer w0.6: L6.1 C23.2
NetC24_2: C24.2 L4.1 L7.2 | length 8.5
  Top Layer w0.6: L7.2 -13.032,44.868 -12.45,45.45 C24.2 -11.05,45.45 -10.426,44.826 L4.1
NetC26_1: C26.1 C28.1 L6.2 L8.2 | length 6.1
  Top Layer w0.6: C28.1 L8.2 L6.2
NetC27_2: C27.2 L7.1 R23.2 | length 13.7
  Top Layer w0.6: L7.1 -14.932,44.732 -15.55,45.35 C27.2 -16.9,40.5 -14.5,38.1 R23.2@-13.8,38.1
NetC28_2: C28.2 L9.1 | length 17.4
  Top Layer w0.6: C28.2 -32.362,6.862 -33.6,8.1 -33.6,11.1 -32.2,12.5 -25.6,12.5 -24.2,13.9 L9.1
NetC30_2: C30.2 C2001.2 R2001.1 R2002.2
NetC31_1: C31.1 L9.2 L10.2 R24.2 | length 10.4
  Top Layer w0.6: L9.2 -18.85,16.65 -15.95,19.55 R24.2
NetR21_1: R21.1 R22.2 | length 2.5
  Top Layer w0.6: R22.2 -12.25,26.932 R21.1
pads on no net: ADC_1.15 ADC_1.16 B1.5 Header1.1 Header1.7 Header1.10 Header1.22

## Polygon pours and split planes (outlines as drawn)
GND on Top Layer "Top_GND_Pour" (solid, remove dead copper, pour order 0): -60.003,3 -60.003,57 cw(c-57.003,57) -57.003,60 -3.003,60 cw(c-3.003,57) -0.003,57 -0.003,3 cw(c-3.003,3) -3.003,0 -57.003,0 cw(c-57.003,3)
GND on Top Layer "Top_GND_Pour" (solid, remove dead copper, pour order 4): -60,3 -60,57 cw(c-57,57) -57,60 -3,60 cw(c-3,57) 0,57 0,3 cw(c-3,3) -3,0 -57,0 cw(c-57,3)
no net on Bottom Solder "SolderMask" (solid): -3,60 cw(c-3,57) 0,57 0,3 cw(c-3,3) -3,0 -57,0 cw(c-57,3) -60,3 -60,57 cw(c-57,57) -57,60
GND on Bottom Layer "Bottom_GND_Pour" (solid, remove dead copper, pour order 2): -60,3 -60,57 cw(c-57,57) -57,60 -3,60 cw(c-3,57) 0,57 0,3 cw(c-3,3) -3,0 -57,0 cw(c-57,3)

## Keep-outs
Keep-Out Layer:
  the board outline again, w0.1

## Other copper
Top Layer:
  rectangle net NetC30_2: -22.1,29.5 -20.6,30.5
  rectangle net ADC_AVDD_FILT: -33.8,21.9 -32.8,28.9
  rectangle net ADC_DVDD_FILT: -37,38.7 -35.3,44.1
  pour cut-out: -55.77,42.7 -55.77,12.22 -49.22,12.22 -49,12 -48,13 -41,13 -37,22.1 -37,27.874 -35,29.7 -35,39.038 -38.662,42.7

## Silkscreen, mask and mechanical layers (free items; w line width, h text height)
Top Overlay:
  lines w0.1: -35,5.5 -32,2.5 -14.5,2.5 -1.5,15.5 -1.5,23 -5,26.5 -9.5,26.5 -13.5,22.5 -16,22.5 -20.5,18 -29,18 -35,12 -35,5.5 ; -19.5,45.5 -19.5,48 -18.5,49 -1.5,49 -1,48.5 -1,40 -6,35 -14,35 -16,37 -16,42 -19.5,45.5 ; -18.5,23 -18.5,24.5 -16,27 -14,27 -13.5,27.5 -13.5,30 -12.5,31 -10.5,31 -10,30.5 -10,29.5 -9.5,29 -9.5,27.5 -13.5,23.5 -15.5,23.5 -16.5,22.5 -18,22.5 -18.5,23
  text "LPF" at -6.22,38.27 h1
  text "BPF" at -15.2,11.6 h1
  text "Designed by Kolos Koblasz" at -40.1,1.2 h1
Bottom Solder:
  pour cut-out: -52,42 -41,42 ccw(c-41,45) -38,45 ccw(c-41,45) -41,48 -52,48
  pour cut-out: -40,22 -40,39 cw(c-37,39) -37,42 -29,42 cw(c-29,39) -26,39 -26,22 cw(c-29,22) -29,19 -37,19 cw(c-37,22)
  pour cut-out: -52,16 -50,16 -50,6 ccw(c-47,6) -47,3 ccw(c-47,6) -44,6 -44,19 ccw(c-47,19) -47,22 -52,22
  lines w0.1: -60,3 ccw(c-57,3) -57,0 -3,0 ccw(c-3,3) 0,3 0,57 ccw(c-3,57) -3,60 -31,60 -34,60 -57,60 ccw(c-57,57) -60,57 -60,3
Mechanical 1:
  circle w0.1: c-54.5,5 r1.75
  circle w0.1: c-5.5,5 r1.75
  circle w0.1: c-5.5,55 r1.75
  circle w0.1: c-54.5,55 r1.75
  lines w0.1: -58.02,12.97 ccw(c-55.02,12.97) -55.02,9.97 -54.02,9.97 ccw(c-54.02,12.97) -51.02,12.97 -51.02,46.97 ccw(c-54.02,46.97) -54.02,49.97 -55.02,49.97 ccw(c-55.02,46.97) -58.02,46.97 -58.02,12.97
Mechanical 2:
  lines w0.1: -52,16 -52,22 -47,22 cw(c-47,19) -44,19 -44,6 cw(c-47,6) -47,3 cw(c-47,6) -50,6 -50,16 -52,16 ; -52,42 -52,48 -41,48 cw(c-41,45) -38,45 cw(c-41,45) -41,42 -52,42 ; -40,22 ccw(c-37,22) -37,19 -29,19 ccw(c-29,22) -26,22 -26,39 ccw(c-29,39) -29,42 -37,42 ccw(c-37,39) -40,39 -40,22